# Altium PCB Steering_Converter_ZXBM5210_1R1.PcbDoc
Units mm, origin at the board's own origin, x right, y up, seen from the top; angles counter-clockwise.
Board outline 49.4 x 37.08 mm, 2 copper layers (Top Layer, Bottom Layer); 24 components, 23 nets, 105 pads, 19 vias.
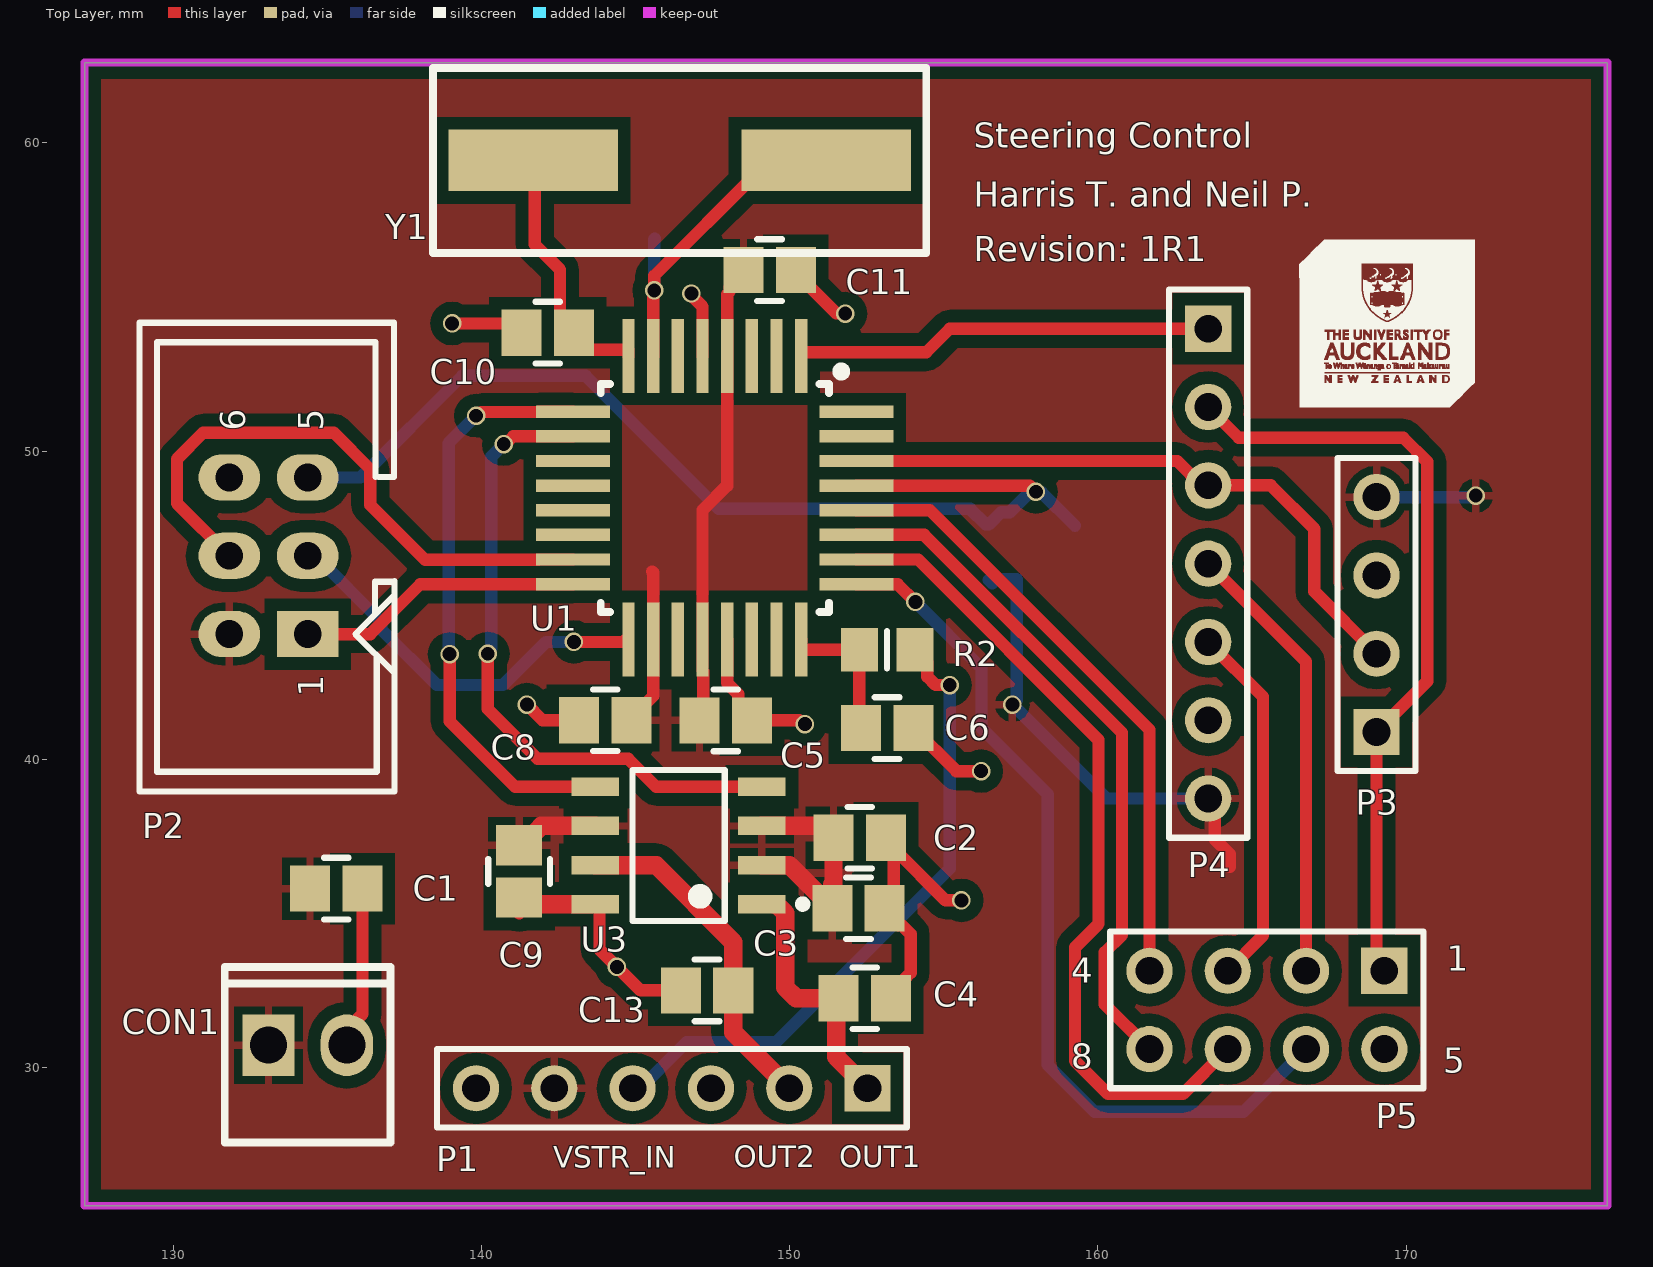
[diagram p0: Top Layer view]
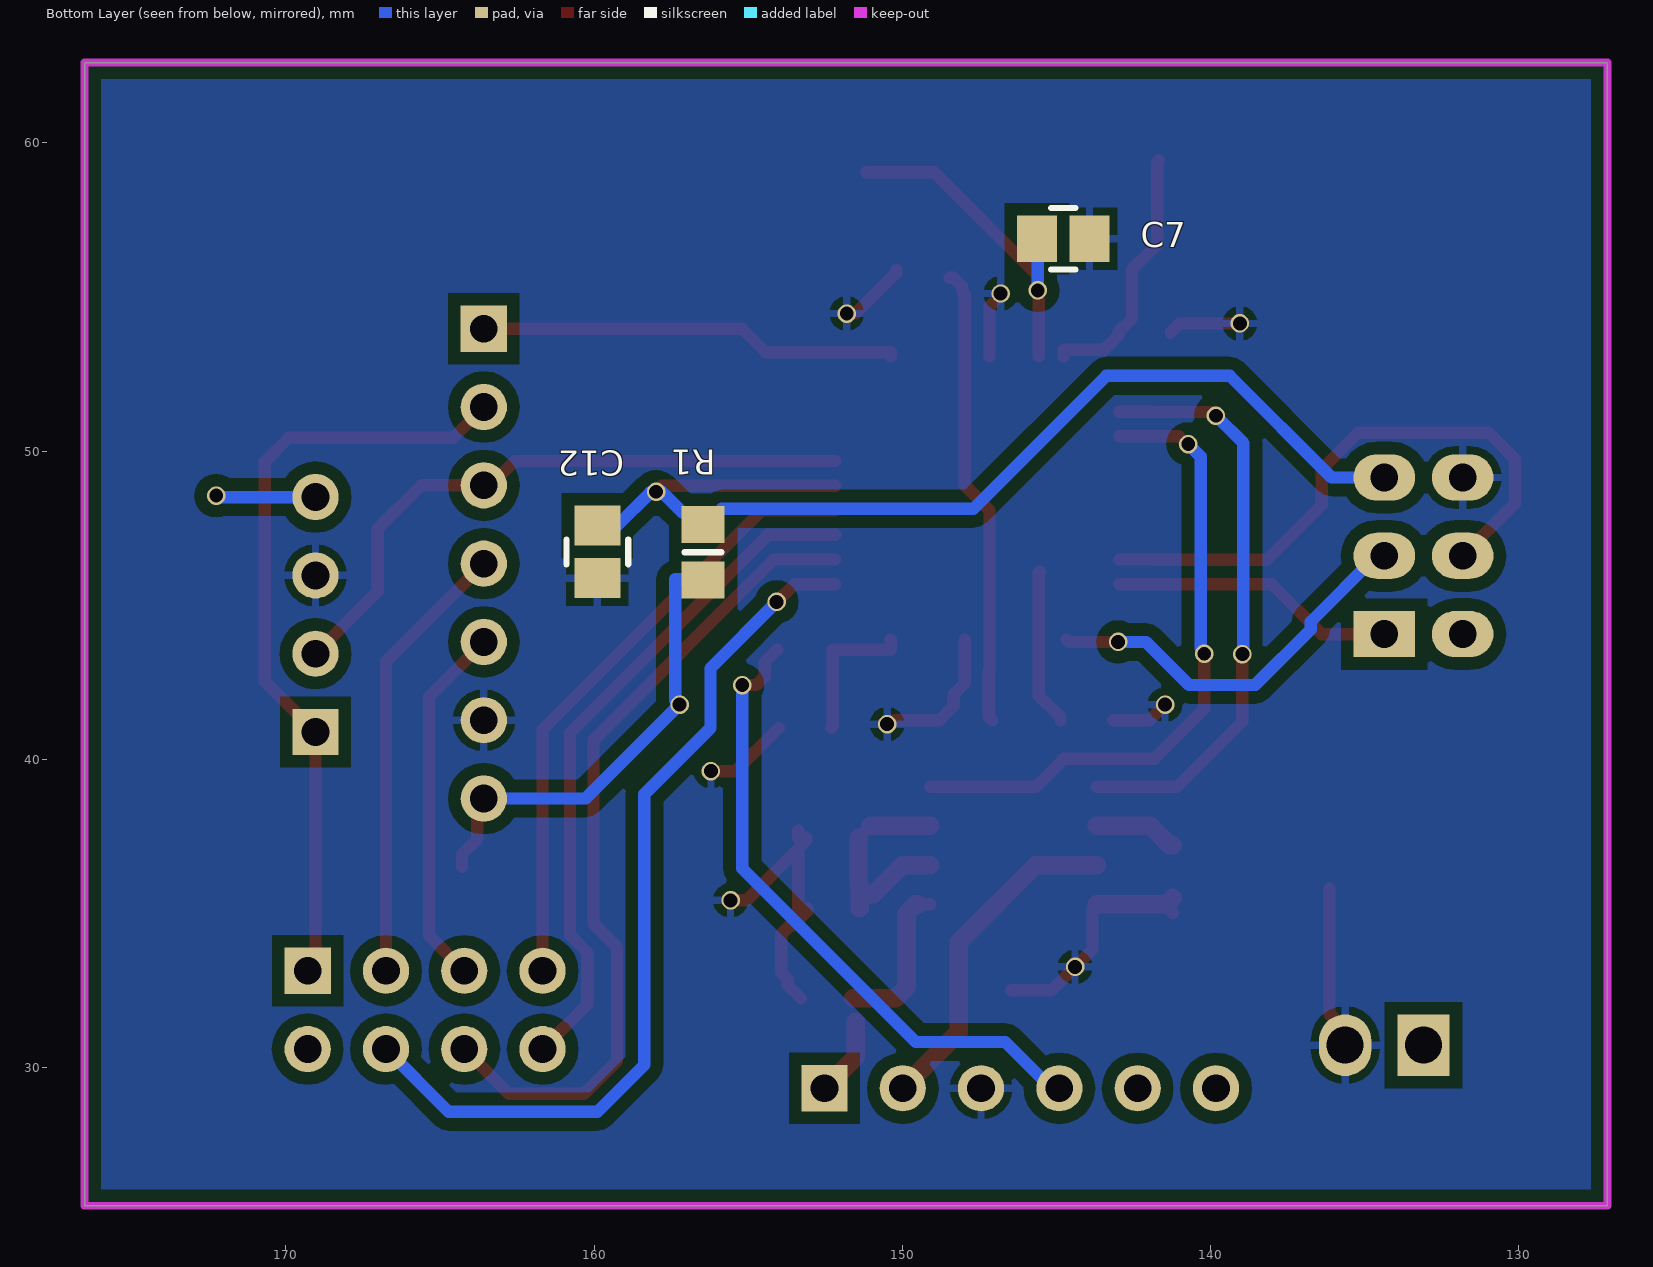
[diagram p1: Bottom Layer view, seen from below]
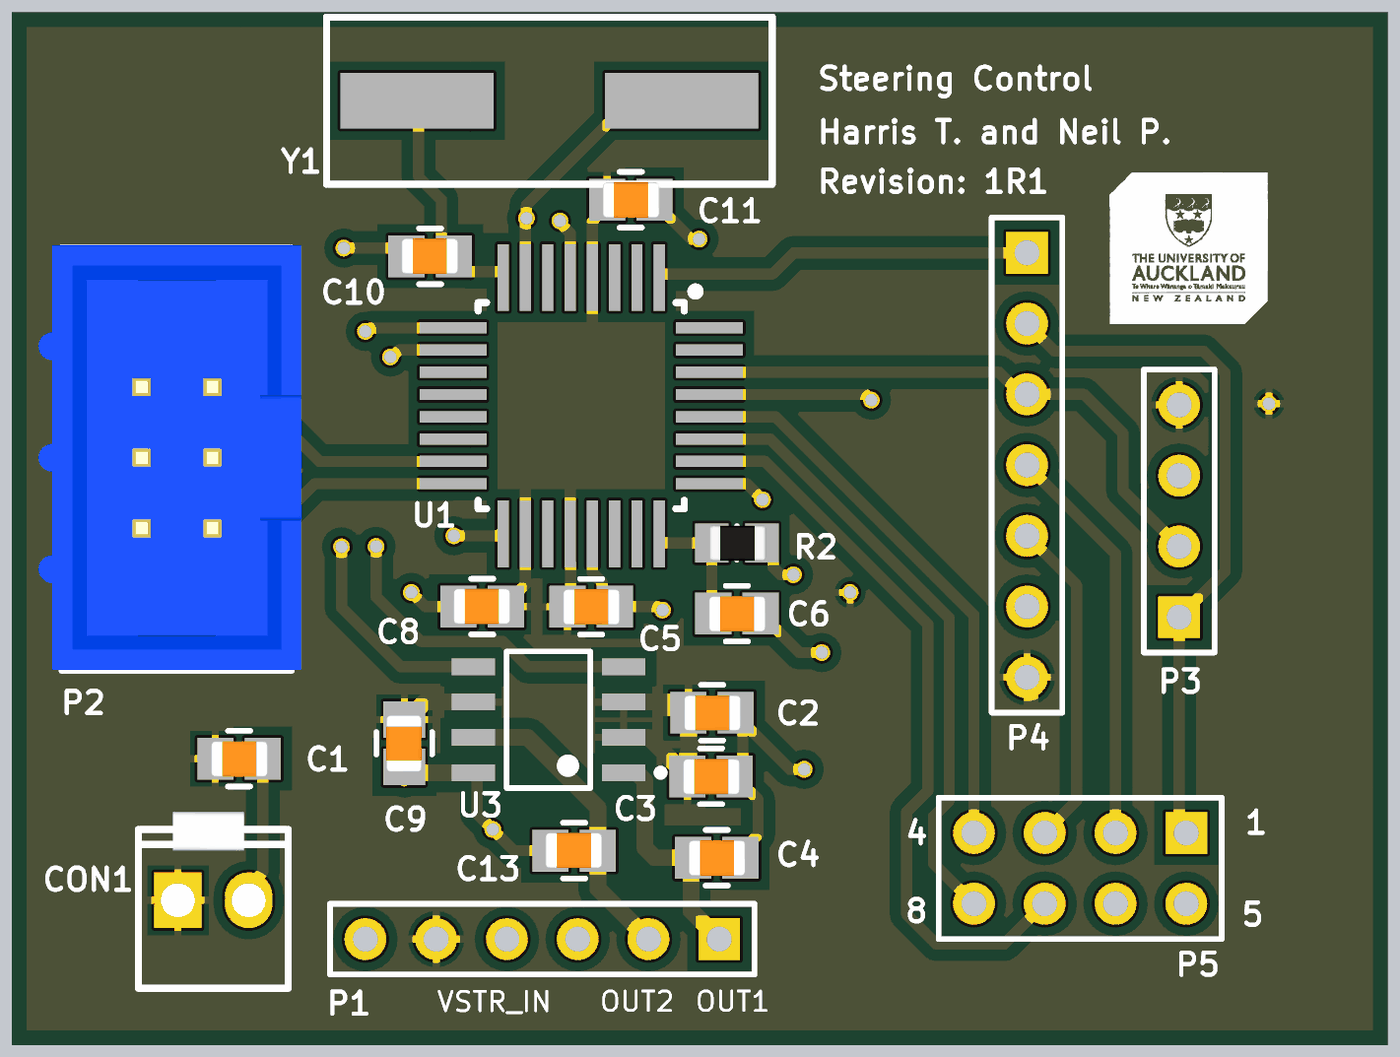
[diagram p2: 3D render of the assembled board from above, using the file's embedded part models]
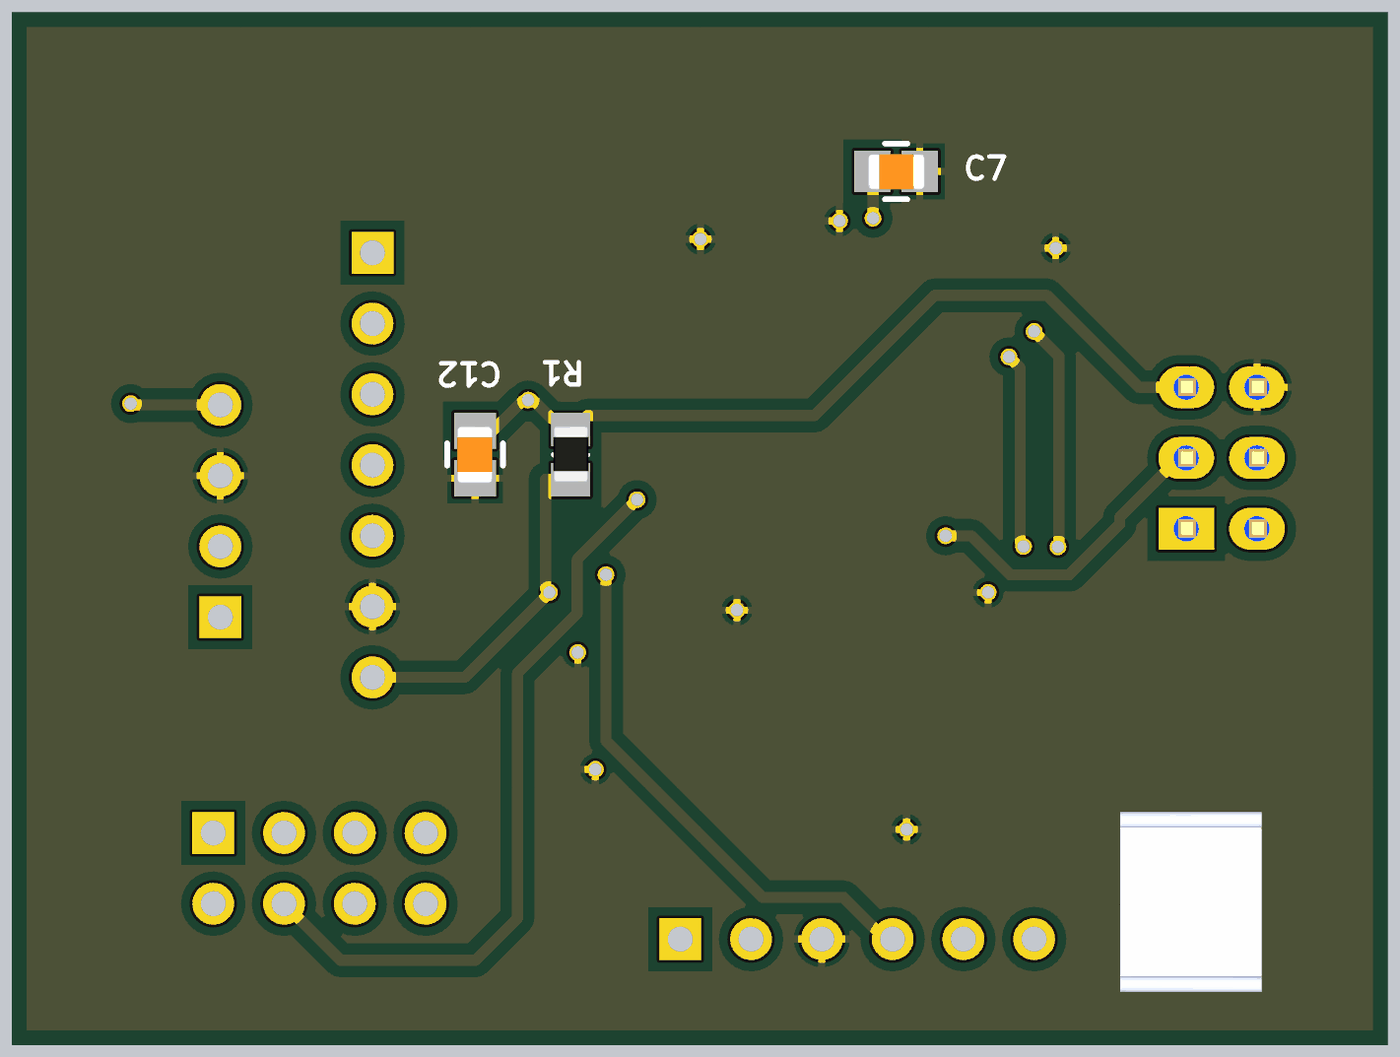
[diagram p3: 3D render of the assembled board from below, using the file's embedded part models]

## Layer stack, top to bottom
Top Solder: solder mask 0.0102, Solder Resist, Dk 3.5
Top Layer: signal copper 0.0356
Dielectric 1: dielectric 0.32, FR-4, Dk 4.8
Bottom Layer: signal copper 0.0356
Bottom Solder: solder mask 0.0102, Solder Resist, Dk 3.5

## Board outline
127.127,25.527 127.127,62.611 176.53,62.611 176.53,25.527

## Design rules (kind name [scope] priority, off if disabled: settings)
Clearance Clearance_1 [InNamedPolygon('3V3_L01_P001') Or InNamedPolygon('GND_L02_P003')] p1: gap=0.4 ignorepadtopadclearanceinfootprint=FALSE
Clearance [All] p2: gap=0.5 ignorepadtopadclearanceinfootprint=TRUE except(0.3: Track-Track Track-SMDPad)
PolygonConnect [All] p1: connectstyle=Relief reliefconductorwidth=0.254 reliefentries=4 polygonreliefangle="90 Angle" airgapwidth=0.254
RoutingVias [All] p1: holewidth=0.711 width=1.27 viastyle="Through Hole" minholewidth=0.711 minwidth=1.27 maxholewidth=0.711 maxwidth=1.27
SolderMaskExpansion [All] p1: expansion=0.102 istentingtop=FALSE
Width [All] p1: maxlimit=0.6 minlimit=0.4 preferedwidth=0.4
30 further rules are at their usual default settings.

## Components (designator, comment, footprint, x,y, rotation, side; value= is the part's Value field where it differs from the comment)
C1 "100n" C0805 135.294,35.814 r180 top value=?
C2 "100n" C0805 152.273,37.465 r180 top value=?
C3 "100n" C0805 152.234,35.179 r180 top value=?
C4 "100n" C0805 152.439,32.258 r180 top value=?
C5 "100n" C0805 147.929,41.27 r180 top value=?
C6 "100n" C0805 153.162,41.021 r180 top value=?
C7 "18p" C0805 144.78,56.896 r0 bottom value=?
C8 "100n" C0805 144.018,41.275 r0 top value=?
C9 "1u" C0805 141.224,36.369 r90 top value=?
C10 "18p" C0805 142.152,53.848 r0 top value=?
C11 "100n" C0805 149.352,55.88 r180 top value=?
C12 "100n" C0805 159.893,46.736 r90 bottom value=?
C13 "100n" C0805 147.32,32.512 r0 top value=?
CON1 "Header 2X1" HDR2X1_2P54 133.096,30.734 r90 top
P1 "Header 6" HDR1X6 152.527,29.337 r180 top
P2 "HDR3X2" HDR2X3_2P54 134.366,44.069 r90 top
P3 "Header 4" HDR1X4 169.037,40.894 r90 top
P4 "BLE Header" HDR1X7 163.576,53.975 r270 top
P5 "Header 4X2A" HDR2X4_CEN 169.291,33.147 r180 top
R1 "Resistor 0805" R0805 156.464,46.725 r270 bottom value=?
R2 "Resistor 0805" R0805 153.162,43.561 r180 top value=?
U1 "ATMega328PB" TQFP32 147.574,48.487 r270 top
U3 "IC_Diodes_ZXBM5210-S-13_eec" Diodes_ZXBM5210-S-13_0 146.398,37.211 r90 top
Y1 "SMT-XTAL 16MHz" HC49-US 146.431,59.436 r180 top

## Footprints (in the part's own frame and the unit in brackets; to place one, negate y for a bottom-side part, rotate by r counter-clockwise, add the part's x,y. Pads: shape width x height; smd on the part's side, far side on the other; paste and mask are expansions set on the pad)
C0805 [mm]
  rect 1.3x1.5 smd: 1(-0.85,0) 2(0.85,0)
  silkscreen extent -0.4,-1 0.4,1, body extent -1.03,-0.63 1,0.64, height 0.65
Diodes_ZXBM5210-S-13_0 [mm]
  rect 0.6x1.55 smd paste+0 mask+0: 1(-1.905,-2.7) 2(-0.635,-2.7) 3(0.635,-2.7) 4(1.905,-2.7) 5(1.905,2.7) 6(0.635,2.7) 7(-0.635,2.7) 8(-1.905,2.7)
  silkscreen extent -2.45,-4.15 2.45,1.5
HC49-US [mm] "20Mhz Crystal"
  rect 5.5x2 smd: 1(-4.75,0) 2(4.75,0)
  silkscreen extent -8,-3 8,3, body extent -4.79,-2.4 4.79,2.4, height 3.8
HDR1X4 [mm] "Connector; Header; 4 Position"
  rect 1.5x1.5 hole 0.9: 1(0,0)
  round 1.5 hole 0.9: 2(2.54,0) 3(5.08,0) 4(7.62,0)
  silkscreen extent -1.27,-1.27 8.89,1.27
HDR1X6 [mm] "Connector; Header; 6 Position"
  rect 1.5x1.5 hole 0.9: 1(0,0)
  round 1.5 hole 0.9: 2(2.54,0) 3(5.08,0) 4(7.62,0) 5(10.16,0) 6(12.7,0)
  silkscreen extent -1.27,-1.27 13.97,1.27
HDR1X7 [mm] "Connector; Header; 7 Position"
  rect 1.5x1.5 hole 0.9: 1(0,0)
  round 1.5 hole 0.9: 2(2.54,0) 3(5.08,0) 4(7.62,0) 5(10.16,0) 6(12.7,0) 7(15.24,0)
  silkscreen extent -1.27,-1.27 16.51,1.27
HDR2X1_2P54 [mm] "Polarised Header 2 way"
  rect 2x1.7 hole 1.2: 1(0,0)
  oval 2x1.7 hole 1.2: 2(0,-2.54)
  silkscreen extent -3.16,-3.96 2.54,1.42, body extent -3.3,-3.64 3.17,1.44, height 7.39
HDR2X3_2P54 [mm] "IDC 3X2 Way 2.54 pitch"
  rect 1.5x2 hole 0.9: 1(0,0)
  oval 1.5x2 hole 0.9 paste+0: 2(0,2.54)
  oval 1.5x2 hole 0.9: 3(2.54,0) 4(2.54,2.54) 5(5.08,0) 6(5.08,2.54)
  silkscreen extent -5.1,-2.82 10.1,5.45, body extent -5.07,-3.17 10.17,6.28, height 9.1
HDR2X4_CEN [mm] "Connector; Header; 4x2 Position"
  rect 1.5x1.5 hole 0.9: 1(0,0)
  round 1.5 hole 0.9: 2(2.54,0) 3(5.08,0) 4(7.62,0) 5(0,2.54) 6(2.54,2.54) 7(5.08,2.54) 8(7.62,2.54)
  silkscreen extent -1.27,-1.27 8.89,3.81
R0805 [mm]
  rect 1.2x1.4 smd: 1(-0.9,0) 2(0.9,0)
  silkscreen extent 0,-0.6 0,0.6, body extent -1.04,-0.63 0.99,0.64, height 0.6
TQFP32 [mm]
  rect 2.4x0.4 smd: 1(-4.6,2.8) 2(-4.6,2) 3(-4.6,1.2) 4(-4.6,0.4) 5(-4.6,-0.4) 6(-4.6,-1.2) 7(-4.6,-2) 8(-4.6,-2.8) 17(4.6,-2.8) 18(4.6,-2) 19(4.6,-1.2) 20(4.6,-0.4) 21(4.6,0.4) 22(4.6,1.2) 23(4.6,2) 24(4.6,2.8)
  rect 0.4x2.4 smd: 9(-2.8,-4.6) 10(-2,-4.6) 11(-1.2,-4.6) 12(-0.4,-4.6) 13(0.4,-4.6) 14(1.2,-4.6) 15(2,-4.6) 16(2.8,-4.6) 25(2.8,4.6) 26(2,4.6) 27(1.2,4.6) 28(0.4,4.6) 29(-0.4,4.6) 30(-1.2,4.6) 31(-2,4.6) 32(-2.8,4.6)
  silkscreen extent -4.24,-3.7 3.7,4.24, body extent -3.5,-3.5 3.5,3.5, height 1.3

## Part data
C1 C2 C3 C4 C5 C6 C7 C8 C9 C10 C11 C12 C13: library part CCAP0805, "CCAP0805", MPN=?, Part Description=?, Type="Surface Mount"
CON1: library part HDR2X1
P1: "Header, 6-Pin", LatestRevisionDate=17-Jul-2002, LatestRevisionNote="Re-released for DXP Platform.", Publisher="Altium Limited"
P2: "Header, 3-Pin, Dual row"
P3: "Header, 4-Pin", LatestRevisionDate=17-Jul-2002, LatestRevisionNote="Re-released for DXP Platform.", Publisher="Altium Limited"
P4: library part "Header 7", "Header, 7-Pin", LatestRevisionDate=17-Jul-2002, LatestRevisionNote="Re-released for DXP Platform.", Publisher="Altium Limited"
P5: "Header, 4-Pin, Dual row", LatestRevisionDate=17-Jul-2002, LatestRevisionNote="Re-released for DXP Platform.", Publisher="Altium Limited"
R1 R2: library part RES0805, "RES0805", MPN=?, Part Description=?, Type="Surface Mount"
U1: "IC MCU 8BIT 32KB FLASH 32TQFP", Supplier Part Number 1=ATMEGA328PB-AU-ND, Supplier 1=Digi-Key, Supplier 2=Digikey, Supplier Part Number 2=ATMEGA328PB-AU-ND
U3: "IC MOTOR DRIVER PWM 8SOIC", Digikey Part Number=ZXBM5210-S-13DICT-ND, Manufacturer=Diodes, Mouser Part Number=621-ZXBM5210-S-13, Package=SO-8, Part Number=ZXBM5210-S-13, Temperature="-40°C to +85°C", Temperature Range High=+85°C, Temperature Range Low=-40°C, Voltage=18V, ComponentLink1Description=Upverter, ComponentLink1URL=https://upverter.com/upn/revision/7a867377f73a3c32/, ComponentLink2Description=Datasheet, ComponentLink2URL=https://www.diodes.com/assets/Datasheets/ZXBM5210.pdf, Digikey Description="IC MOTOR DRIVER PWM 8SOIC", helpURL=https://upverter.com/upn/revision/7a867377f73a3c32/, Lead Free=yes, Price=0.759009212461, RoHS=TRUE, Supplier 1=Digi-Key, Supplier 2=Mouser, Supplier Part Number 1=ZXBM5210-S-13DICT-ND, Supplier Part Number 2=621-ZXBM5210-S-13
Y1: library part TXC9C-16_XTAL_SMT, "9C-16.000MAAJ-T crystal 16.0000MHZ 18PF SMD", Frequency Stability=±30ppm, Load Capacitance=18pF, Manufacturer="TXC CORPORATION", Manufacturer Part Number=9C-16.000MAAJ-T, Operating Mode=Fundamental, Operating Temperature="-20°C ~ 70°C", Package / Case=HC-49/US, Ratings=-, Supplier Part Number 1=887-1059-1-ND, Category="Crystals, Oscillators, Resonators", ComponentLink1Description=http://www.txccorp.com/download/products/quartz_crystals/2015TXC_9C_32.pdf, ComponentLink1URL=http://www.txccorp.com/download/products/quartz_crystals/2015TXC_9C_32.pdf, Frequency Tolerance=±30ppm, Height - Seated (Max)="0.161\" (4.10mm)", Mounting Type="Surface Mount", Packaging="Cut Tape (CT)", Part Status=Active, Pricing 1="1=0.75, 10=0.628, 50=0.5656, 100=0.5026, 500=0.47744 (NZD)", RoHS="RoHS Compliant", Size / Dimension="0.449\" L x 0.189\" W (11.40mm x 4.80mm)", Stock 1=11514, Supplier 1=Digi-Key, Type="MHz Crystal"

## Via types
v1: diameter 0.6, hole 0.45, Top Layer to Bottom Layer, 19 vias

## Nets (pads, with @x,y where several pads share a name; then routed paths per layer and width w, separated by ;. In a path a pad name is that pad's centre, name@x,y a point inside that pad or via, vN(x,y) a via of type N, cw(c..) or ccw(c..) an arc to the next point about the centre after c; other vN are vias at no path point)
3V3: C1.2 C2.2 C3.2 C5.2 C8.2 C9.2 C11.2 CON1.1 P1.5 P2.2 P3.4 P4.7 R1.2 U1.4 U1.18 U1.20 U3.2 U3.3 U3.6 | length 48.7
  Top Layer w0.4: C8.2 144.868,41.375 145.318,41.825 145.34,41.825 145.574,42.059 U1.18@145.574,43.787 ; 145.542,46.101 145.574,46.069 U1.18 ; C5.2 147.193,41.384 147.193,42.868 147.174,42.887 U1.20 147.174,48.087 147.974,48.887 147.974,55.096 148.052,55.174 148.052,55.33 148.348,55.626 C11.2@148.463,55.626 ; C2.2@151.042,37.846 C2.2 ; P4.7 163.786,38.525 163.786,37.427 164.285,36.929 164.285,36.523
  Top Layer w0.6: C9.2 141.324,37.219 141.951,37.846 U3.6 ; U3.2 149.987,36.576 150.934,35.629 151.315,35.629 C3.2@151.384,35.56 ; U3.3 C2.2@151.042,37.846 ; C3.2 C3.2@151.384,35.56 ; 151.384,35.941 C3.2@151.384,35.56 ; 151.423,35.941 C2.2
  Bottom Layer w0.4: R1.2 156.569,45.72 156.696,45.847 157.364,45.847 157.364,41.921 v1(157.226,41.783) 160.274,38.735 P4.7 ; P3.4 v1@172.257,48.514
  other v1: 172.257,48.56
BLE_RST: P4.1 U1.1 | length 14.2
  Top Layer w0.4: U1.1 150.374,53.213 154.432,53.213 155.194,53.975 P4.1
  Bottom Layer w0.6: P4.1 P4.1@163.957,54.356
CTS_0: P4.4 P5.2 | length 14.5
  Top Layer w0.4: P4.4 166.751,43.18 P5.2
DRT: P5.8 U1.27 | length 22.4
  Top Layer w0.4: U1.27 154.363,47.287 160.782,40.868 160.782,34.309 160.221,33.748 160.221,32.057 P5.8
GND: C1.1 C2.1 C3.1 C4.1 C5.1 C6.1 C7.1 C8.1 C9.1 C10.1 C11.1 C12.1 C13.1 CON1.2 P1.3 P2.6 P3.3 P4.6 U1.5 U1.21 U3.8 | length 37.9
  Top Layer w0.4: CON1.2@136.144,30.932 135.885,31.191 135.885,31.485 136.144,31.744 C1.1 ; v1(139.052,54.145) 141.005,54.145 C10.1 ; C9.1@141.224,35.019 C9.1@141.511,35.306 ; v1(141.478,41.783) 141.986,41.275 C8.1 ; U3.8@143.834,35.179 143.834,33.839 v1(144.399,33.274) 145.161,32.512 C13.1 ; v1(146.812,55.118) 146.85,55.08 146.85,55.016 147.174,54.693 U1.5 ; U1.21 147.974,42.482 148.329,42.127 148.329,41.75 C5.1@148.804,41.275 ; C5.1 148.784,41.275 C5.1@148.804,41.275 ; C11.1 150.202,55.78 151.515,54.467 v1(151.804,54.467) ; v1(150.495,41.148) 150.441,41.148 150.314,41.275 C5.1@148.804,41.275 ; C3.1 153.084,35.079 153.534,34.629 153.634,34.629 153.924,34.339 153.924,33.084 153.739,32.899 153.739,32.708 C4.1 ; C2.1 153.123,37.365 C2.1@153.377,37.111 ; C3.1@153.377,35.179 C2.1@153.377,37.111 ; C2.1@153.377,37.465 C2.1@153.377,37.692 ; C6.1 155.409,39.624 v1(156.21,39.624) ; v1(155.575,35.433) 155.055,35.433 C2.1@153.377,37.111
  Top Layer w0.6: C9.1 141.437,35.306 U3.8
IN1: U1.10 U3.4 | length 21.1
  Top Layer w0.4: v1(140.208,43.434) 140.208,41.639 141.822,40.025 144.76,40.025 145.669,39.116 U3.4 ; v1(140.729,50.236) 140.783,50.236 141.034,50.487 U1.10
  Bottom Layer w0.4: v1@140.3,43.444 140.246,43.498 140.246,43.526 140.325,43.605 140.325,49.828 140.729,50.232 v1(140.729,50.236)
IN2: U1.9 U3.5 | length 19.1
  Top Layer w0.4: v1(138.971,43.418) 138.971,41.242 141.097,39.116 U3.5 ; v1(139.827,51.154) 139.881,51.154 140.001,51.274 141.844,51.274 141.857,51.287 U1.9
  Bottom Layer w0.4: v1(138.971,43.418) 138.938,43.451 138.938,50.265 v1(139.827,51.154)
MISO: P2.1 U1.16 | length 9.3
  Top Layer w0.4: P2.1 136.398,44.069 138.016,45.687 U1.16
MOSI: P2.4 U1.15 | length 19.4
  Top Layer w0.4: P2.4 130.126,48.309 130.126,49.75 130.975,50.599 135.217,50.599 136.398,49.418 136.398,48.26 138.176,46.482 141.852,46.482 141.857,46.487 U1.15
OUT1: C4.2 P1.1 U3.1 | length 7.7
  Top Layer w0.4: U3.1 U3.1@149.479,35.306
  Top Layer w0.6: U3.1@149.479,35.306 149.573,35.306 149.86,35.019 149.86,32.609 150.211,32.258 C4.2 ; 151.511,31.496 151.511,30.353 P1.1
OUT2: C13.2 P1.2 U3.7 | length 11
  Top Layer w0.6: U3.7 145.669,36.576 148.17,34.075 C13.2 148.17,31.154 P1.2
RST: C12.2 P2.5 R1.1 U1.29 | length 35
  Top Layer w0.4: U1.29 157.788,48.887 v1(157.988,48.687)
  Bottom Layer w0.4: P2.5 136.079,49.149 139.381,52.451 143.383,52.451 147.701,48.133 155.856,48.133 156.364,47.625 R1.1 156.864,48.025 157.145,48.025 157.85,48.73 v1@157.896,48.73 ; v1(157.988,48.687) 158.123,48.687 158.142,48.668 158.176,48.668 C12.2@159.258,47.586
RTS_0: P4.5 P5.3 | length 11.9
  Top Layer w0.4: P4.5 165.354,42.037 165.354,34.29 P5.3
RX_0: P3.1 P4.2 P5.1 | length 25.1
  Top Layer w0.4: P4.2 164.57,50.441 169.904,50.441 170.688,49.657 170.688,42.545 P3.1 169.037,33.401 P5.1
SCK: P2.3 U1.17 | length 12.7
  Top Layer w0.4: v1(143.002,43.815) 144.602,43.815 U1.17@144.674,43.887
  Bottom Layer w0.4: P2.3 134.616,46.609 136.754,44.471 136.754,44.221 138.557,42.418 140.699,42.418 142.096,43.815 v1@142.875,43.815
SPD_1: P5.6 U1.25 | length 28.8
  Top Layer w0.4: U1.25 153.502,45.687 v1(154.078,45.112)
  Bottom Layer w0.4: v1(154.078,45.112) 156.226,42.963 156.226,41.022 158.369,38.879 158.369,30.099 159.893,28.575 164.719,28.575 P5.6
SPD_2: P5.7 U1.26 | length 27
  Top Layer w0.4: U1.26 154.173,46.487 160.02,40.64 160.02,34.671 159.258,33.909 159.258,30.226 160.327,29.157 162.761,29.157 P5.7
ST_INT: P5.4 U1.28 | length 20.3
  Top Layer w0.4: U1.28 154.553,48.087 161.671,40.969 P5.4
TX_0: P3.2 P4.3 U1.30 | length 20.6
  Top Layer w0.4: U1.30 162.574,49.687 163.366,48.895 165.608,48.895 167.022,47.481 167.022,45.449 P3.2
VSTR_IN: P1.4 R2.1 | length 21.1
  Top Layer w0.4: R2.1 154.462,43.161 154.462,42.691 154.735,42.418 v1(155.194,42.418)
  Bottom Layer w0.4: P1.4@145.161,29.337 146.661,30.837 149.565,30.837 155.194,36.466 v1(155.194,42.418)
  Bottom Layer w0.5: P1.4 P1.4@145.161,29.337
VSTR_OUT: C6.2 R2.2 U1.24 | length 4.8
  Top Layer w0.4: U1.24 150.374,43.561 R2.2 152.262,41.071 C6.2
X1: C7.2 U1.7 Y1.1 | length 11.2
  Top Layer w0.4: U1.7 v1@145.574,55.198 ; v1(145.609,55.217) 145.609,55.693 148.971,59.055 Y1.1@151.181,59.055
  Bottom Layer w0.4: v1(145.609,55.217) 145.609,56.875 C7.2
X2: C10.2 U1.8 Y1.2 | length 8.4
  Top Layer w0.4: Y1.2 141.732,59.385 141.732,56.711 142.552,55.891 142.552,54.298 C10.2 143.002,53.748 143.452,53.298 144.774,53.298 U1.8
pads on no net: P1.6 P5.5 U1.2 U1.3 U1.6 U1.11 U1.12 U1.13 U1.14 U1.19 U1.22 U1.23 U1.31 U1.32

## Polygon pours and split planes (outlines as drawn)
GND on Bottom Layer "GND_L02_P003" (solid, remove dead copper, pour order 3): 127.127,62.611 176.53,62.611 176.53,25.527 127.127,25.527
3V3 on Top Layer "3V3_L01_P001" (solid, remove dead copper, pour order 1): 127.127,62.611 176.53,62.611 176.53,25.527 127.127,25.527

## Keep-outs
Keep-Out Layer:
  lines w0.254: 127.127,25.527 176.53,25.527 176.53,26.924 176.53,62.611 127.127,62.611 127.127,25.527

## Silkscreen, mask and mechanical layers (free items; w line width, h text height)
Top Overlay:
  drawing of 24 lines, arcs and shapes, not listed
  text "Steering Control" at 155.979,59.853 h0.8
  text "Harris T. and Neil P." at 155.979,57.935 h0.8
  text "Revision: 1R1" at 155.979,56.157 h0.8
  text "VSTR_IN" at 142.34,26.76 h0.7
  text "OUT2" at 148.182,26.77 h0.7
  text "OUT1" at 151.611,26.77 h0.7

## Text inside footprints (layer, text, board x,y; h text height)
P2: Top Overlay "1" at 134.874,42.037 h0.8 r90; Top Overlay "5" at 134.874,50.673 h0.8 r90; Top Overlay "6" at 132.334,50.673 h0.8 r90
P5: Top Overlay "8" at 159.131,29.972 h0.8; Top Overlay "4" at 159.131,32.766 h0.8; Top Overlay "1" at 171.323,33.147 h0.8; Top Overlay "5" at 171.196,29.845 h0.8